# Altium PCB PA_8CH_USER_IFC.PcbDoc
Units mm, origin at the board's own origin, x right, y up, seen from the top; angles counter-clockwise.
Board outline 78 x 45 mm, 2 copper layers (Top Layer, Bottom Layer), stack 1.571 mm thick; 72 components, 88 nets, 324 pads, 96 vias.
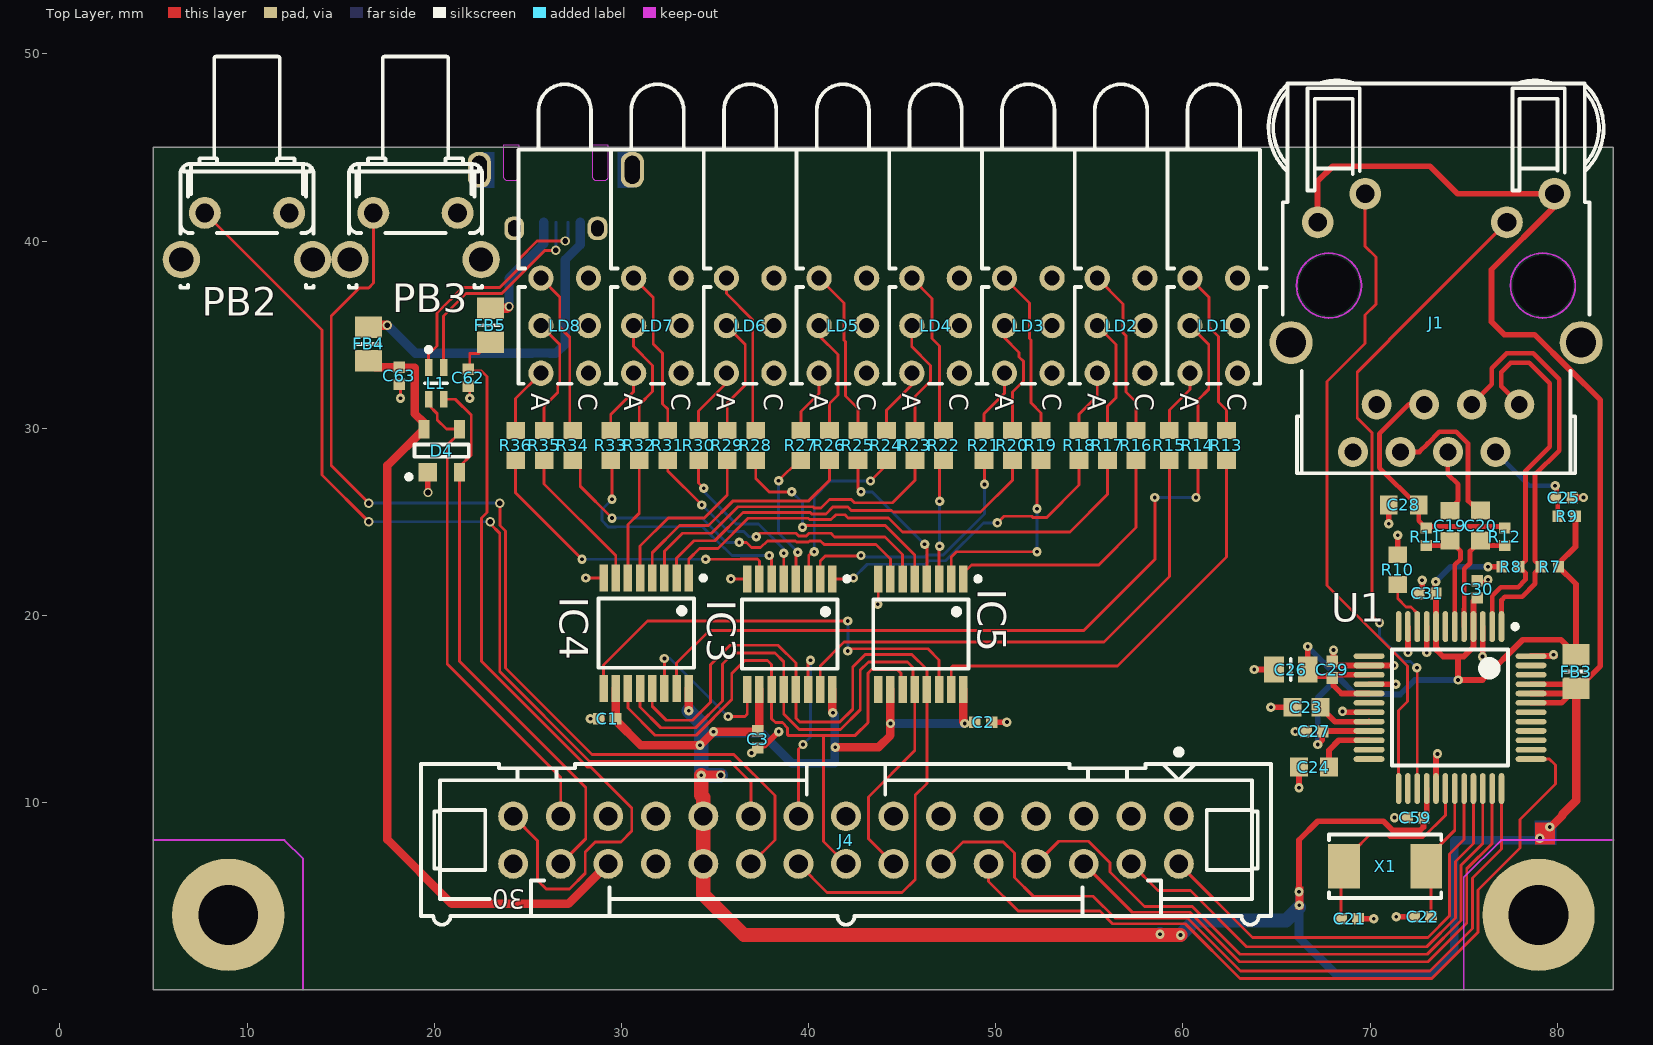
[diagram p0: Top Layer view]
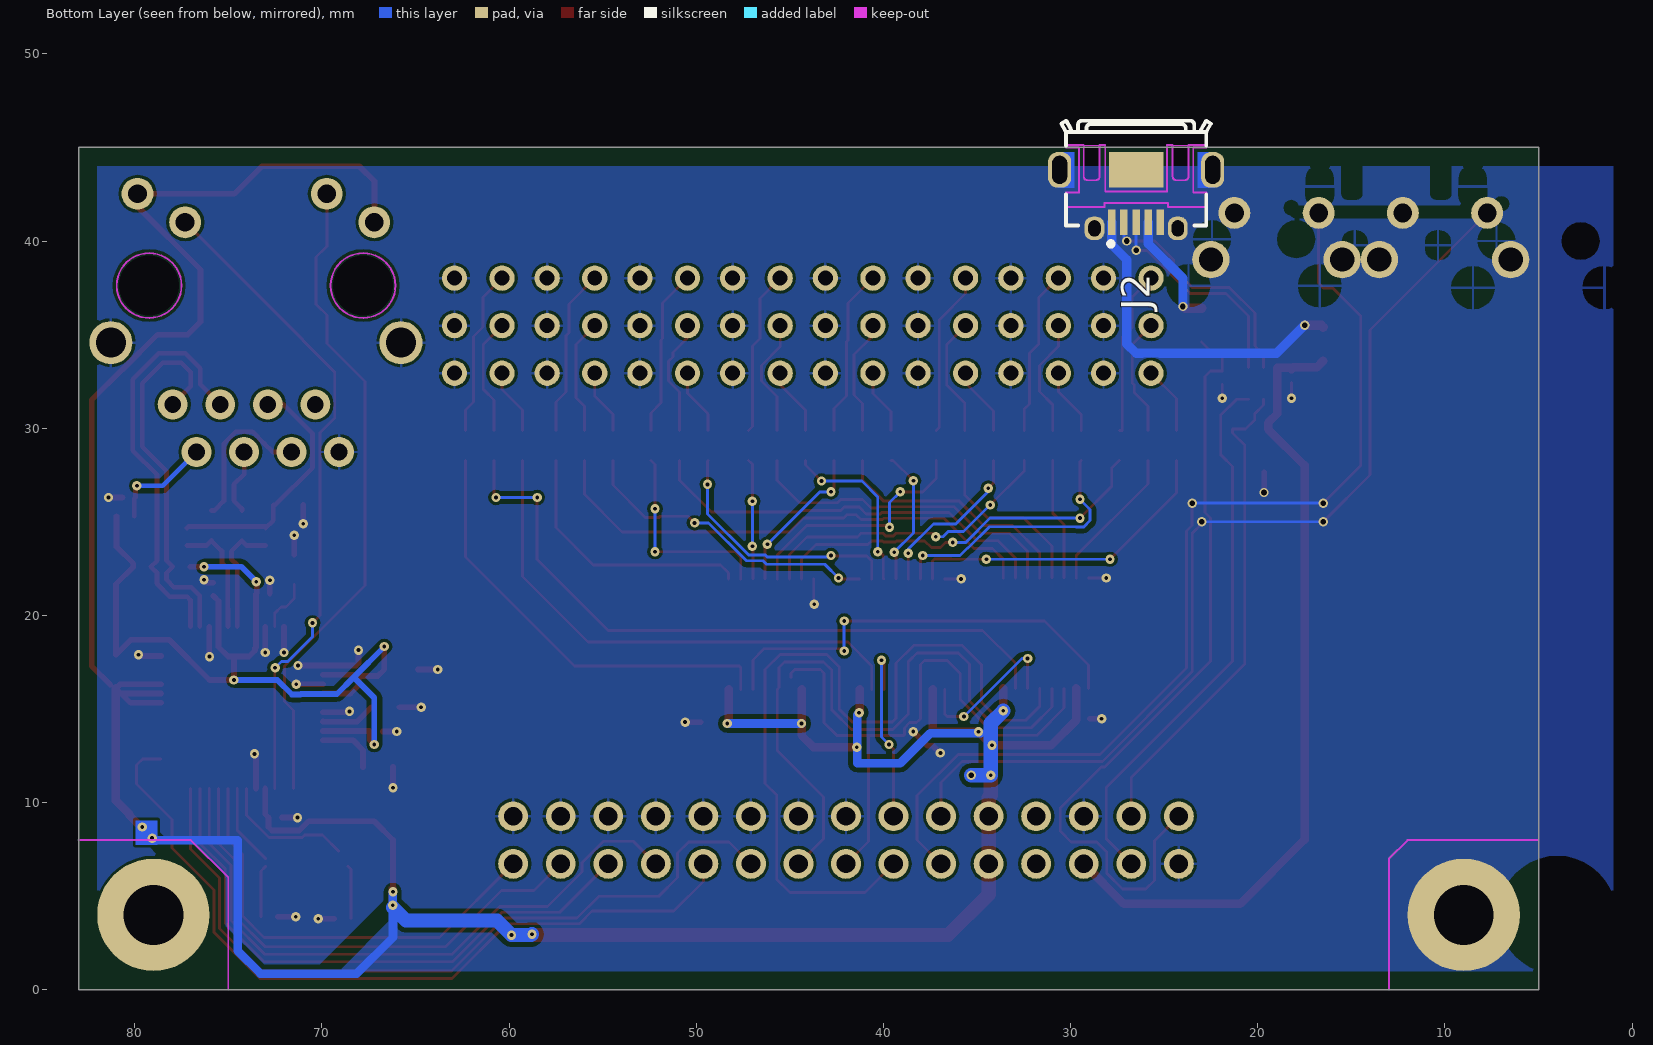
[diagram p1: Bottom Layer view, seen from below]
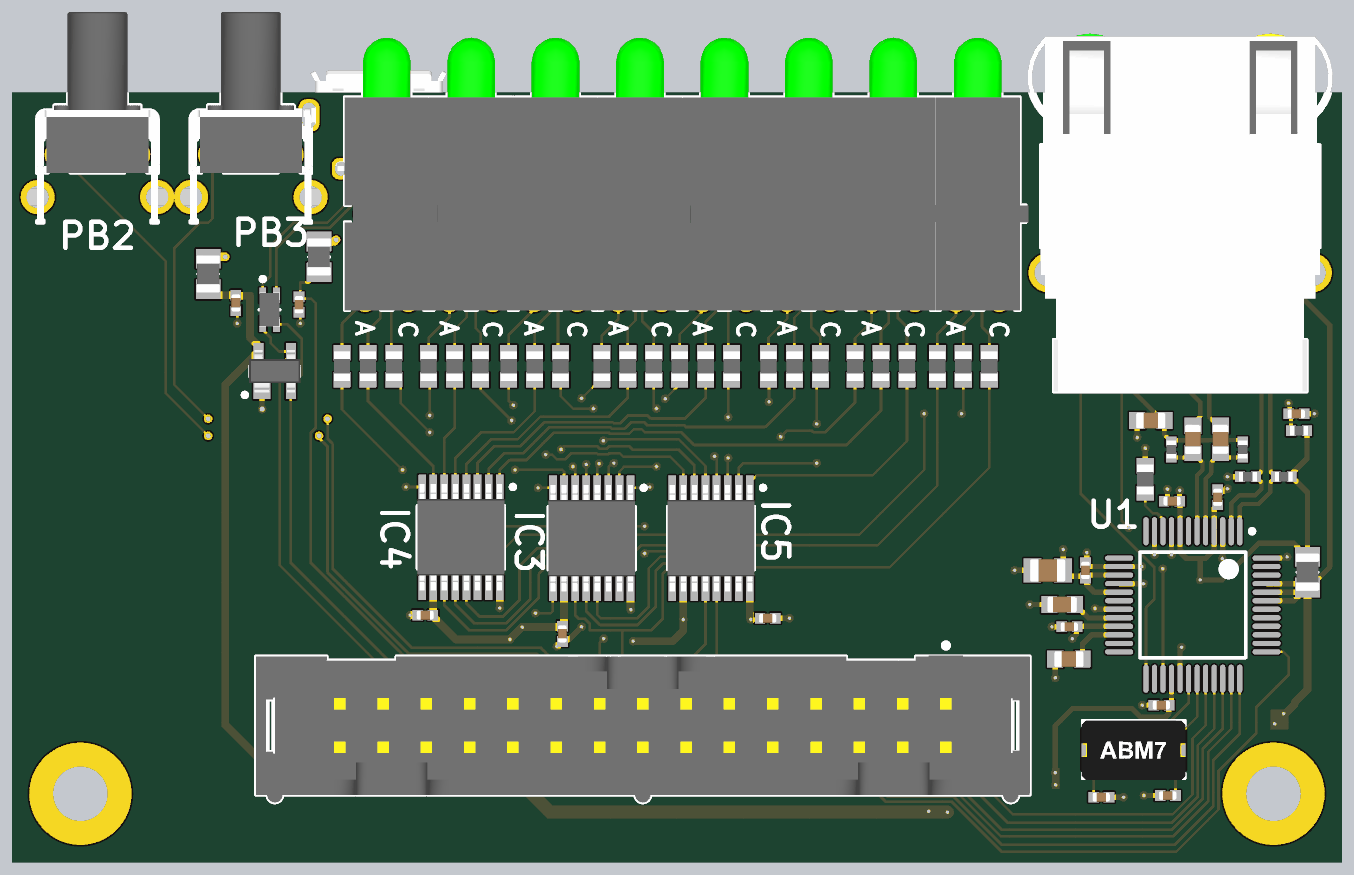
[diagram p2: 3D render of the assembled board from above, using the file's embedded part models]

## Layer stack, top to bottom
Top Solder: solder mask 0.0102, Solder Resist, Dk 3.5
Top Layer: signal copper 0.0356
Dielectric 1: dielectric 1.5, FR-4, Dk 4.8
Bottom Layer: signal copper 0.0356
Bottom Solder: solder mask 0.0102, Solder Resist, Dk 3.5

## Board outline
5,0 83,0 83,45 5,45

## Design rules (kind name [scope] priority, off if disabled: settings)
Clearance [All] p1: gap=0.152 except(0.254: Track-Poly Poly-Poly)
DiffPairsRouting [All] p1: maxlimit=0.254 minlimit=0.254 mostfreqgap=0.254 toplayer_minwidth=0.254 toplayer_maxwidth=0.381 toplayer_prefwidth=0.381 bottomlayer_minwidth=0.254 bottomlayer_maxwidth=0.381 bottomlayer_prefwidth=0.381 maxuncoupledlength=12.7
HoleSize [All] p1: absolutevalues=TRUE maxlimit=5.08 minlimit=0.2 maxpercent=80.000 minpercent=20.000
MinimumSolderMaskSliver [All] p1: minsoldermaskwidth=0.025
PolygonConnect PolygonConnect_pad [IsPad] p1: connectstyle=Relief reliefconductorwidth=0.152 reliefentries=4 polygonreliefangle="90 Angle" airgapwidth=0.152
PolygonConnect [All] p2: connectstyle=Direct reliefconductorwidth=0.254 reliefentries=4 polygonreliefangle="45 Angle" airgapwidth=0.254
RoomDefinition PA_8CH_USER_IFC [InComponentClass('PA_8CH_USER_IFC')] p1 off: confinementstyle=ConfineIn formatcopy=TRUE lockcomponents=FALSE outline 85.598,0.33 85.598,46.761 0.229,46.761 0.229,0.33
RoomDefinition U_LEDs [InComponentClass('U_LEDs')] p2 off: confinementstyle=ConfineIn formatcopy=TRUE lockcomponents=FALSE outline 86.557,48.796 15.818,48.796 15.818,-0.353 86.557,-0.353
RoomDefinition U_ETH_IFC [InComponentClass('U_ETH_IFC')] p3 off: confinementstyle=ConfineIn formatcopy=TRUE lockcomponents=FALSE outline 88.269,45.748 64,45.748 64,-0.861 88.269,-0.861
RoutingVias [All] p1: holewidth=0.711 width=0.5 viastyle="Through Hole" minholewidth=0.3 minwidth=0.5 maxholewidth=0.3 maxwidth=1.27
SilkToSilkClearance [All] p1: silktosilkclearance=0
SilkToSolderMaskClearance [IsPad] p1: minsilkscreentomaskgap=0 clearancetoexposedcopper=TRUE
SolderMaskExpansion [All] p1: expansion=0.102
Width [All] p1: maxlimit=2.54 minlimit=0.152 preferedwidth=0.152
25 further rules are at their usual default settings.

## Classes and differential pairs
component class PA_8CH_USER_IFC: C62 C63 D4 FB4 FB5 J2 J4 L1 PB2 PB3
component class U_ETH_IFC: C19 C20 C21 C22 C23 C24 C25 C26 C27 C28 C29 C30 C31 C59 FB3 J1 R7 R8 R9 R10 R11 R12 U1 X1
component class U_LEDs: C1 C2 C3 IC3 IC4 IC5 LD1 LD2 LD3 LD4 LD5 LD6 LD7 LD8 R13 R14 R15 R16 R17 R18 R19 R20 R21 R22 R23 R24 R25 R26 R27 R28 R29 R30 R31 R32 R33 R34 R35 R36
differential pair RJ45_TX: +RJ45_TX_P -RJ45_TX_N
differential pair RJ45_RX: +RJ45_RX_P -RJ45_RX_N
differential pair RJ45_RX_C: +RJ45_RX_C_P -RJ45_RX_C_N

## Components (designator, comment, footprint, x,y, rotation, side; value= is the part's Value field where it differs from the comment)
C1 "100nF" CAPC1005X55N 29.235,14.478 r180 top
C2 "100nF" CAPC1005X55N 49.327,14.3 r0 top
C3 "100nF" CAPC1005X55N 37.287,13.386 r270 top
C19 "10nF" CAPC1608X87N 74.27,24.793 r90 top
C20 "10nF" CAPC1608X87N 75.9,24.8 r90 top
C21 "22pF" CAPC1005X55N 68.9,3.8 r180 top
C22 "22pF" CAPC1005X55N 72.8,3.9 r0 top
C23 "4.7uF" CAPC1709X95N 66.6,15.1 r180 top
C24 "10nF" CAPC1608X87N 67,11.9 r0 top
C25 "100nF" CAPC1005X55N 80.34,26.289 r0 top
C26 "10uF" CAPC2012X135N 65.761,17.109 r180 top
C27 "100nF" CAPC1005X55N 67.024,13.8 r180 top
C28 "10nF" CAPC1608X87N 71.8,25.9 r0 top
C29 "100nF" CAPC1005X55N 67.971,17.109 r90 top
C30 "100nF" CAPC1005X55N 75.724,21.4 r90 top
C31 "100nF" CAPC1005X55N 73.051,21.173 r180 top
C59 "100nF" CAPC1005X55N 72.424,9.2 r180 top
C62 "100nF" CAPC1005X55N 21.824,32.7 r90 top
C63 "100nF" CAPC1005X55N 18.124,32.8 r90 top
D4 "PRTR5V0U2X" SOT190P230X110-4N 20.4,28.8 r90 top
FB3 "220R@100MHz" INDC2012X105N 81,17 r90 top
FB4 "220R@100MHz" INDC2012X105N 16.5,34.5 r90 top
FB5 "220R@100MHz" INDC2012X105N 23,35.5 r90 top
IC3 "SN74LV595APWT" SOP65P640X120-16N 39,19 r270 top
IC4 "SN74LV595APWT" SOP65P640X120-16N 31.325,19.05 r270 top
IC5 "SN74LV595APWT" SOP65P640X120-16N 46,19 r270 top
J1 "RJ45" TYCO_5-6605308-1 73.525,30 r180 top locked
J2 "Micro-USB AB 2.0" HIROSE_ZX62RD-AB-5P8 26.5,41 r0 bottom locked
J4 "Familly" 3M_N2530-6002RB 42,8 r180 top
L1 "90R@100MHz" IND_MURATA_DLW21S 20.1,32.4 r270 top
LD1 "Red/Yellow/Green" LED_MENTOR_1882.2781 61.645,35.478 r270 top locked
LD2 "Red/Yellow/Green" LED_MENTOR_1882.2781 56.692,35.478 r270 top locked
LD3 "Red/Yellow/Green" LED_MENTOR_1882.2781 51.739,35.478 r270 top locked
LD4 "Red/Yellow/Green" LED_MENTOR_1882.2781 46.786,35.478 r270 top locked
LD5 "Red/Yellow/Green" LED_MENTOR_1882.2781 41.833,35.478 r270 top locked
LD6 "Red/Yellow/Green" LED_MENTOR_1882.2781 36.88,35.478 r270 top locked
LD7 "Red/Yellow/Green" LED_MENTOR_1882.2781 31.927,35.478 r270 top locked
LD8 "Red/Yellow/Green" LED_MENTOR_1882.2781 26.974,35.478 r270 top locked
PB2 "Push Button" PB_TYCO_1-1825027-1 10,41.5 r270 top locked
PB3 "Push Button" PB_TYCO_1-1825027-1 19,41.5 r270 top locked
R7 "49R9" RESC1005X40N 79.6,22.6 r0 top
R8 "49R9" RESC1005X40N 77.5,22.6 r180 top
R9 "10" RESC1005X40N 80.5,25.3 r180 top
R10 "12k4" RESC1608X55N 71.476,22.443 r90 top
R11 "49R9" RESC1005X40N 73,24.2 r270 top
R12 "49R9" RESC1005X40N 77.2,24.2 r270 top
R13 "330" RESC1608X55N 62.323,29.082 r90 top
R14 "330" RESC1608X55N 60.799,29.082 r90 top
R15 "330" RESC1608X55N 59.275,29.082 r90 top
R16 "330" RESC1608X55N 57.497,29.082 r90 top
R17 "330" RESC1608X55N 55.973,29.082 r90 top
R18 "330" RESC1608X55N 54.449,29.082 r90 top
R19 "330" RESC1608X55N 52.417,29.082 r90 top
R20 "330" RESC1608X55N 50.893,29.082 r90 top
R21 "330" RESC1608X55N 49.369,29.082 r90 top
R22 "330" RESC1608X55N 47.21,29.082 r90 top
R23 "330" RESC1608X55N 45.686,29.082 r90 top
R24 "330" RESC1608X55N 44.162,29.082 r90 top
R25 "330" RESC1608X55N 42.638,29.082 r90 top
R26 "330" RESC1608X55N 41.114,29.082 r90 top
R27 "330" RESC1608X55N 39.59,29.082 r90 top
R28 "330" RESC1608X55N 37.177,29.082 r90 top
R29 "330" RESC1608X55N 35.653,29.082 r90 top
R30 "330" RESC1608X55N 34.129,29.082 r90 top
R31 "330" RESC1608X55N 32.478,29.082 r90 top
R32 "330" RESC1608X55N 30.954,29.082 r90 top
R33 "330" RESC1608X55N 29.43,29.082 r90 top
R34 "330" RESC1608X55N 27.398,29.082 r90 top
R35 "330" RESC1608X55N 25.874,29.082 r90 top
R36 "330" RESC1608X55N 24.35,29.082 r90 top
U1 "W5500" WIZ-W5500-LQFP-48_M 74.27,15.077 r270 top
X1 "QSDG25M000-TXC" XTAL_5.0*3.2 70.8,6.6 r0 top

## Footprints (in the part's own frame and the unit in brackets; to place one, negate y for a bottom-side part, rotate by r counter-clockwise, add the part's x,y. Pads: shape width x height; smd on the part's side, far side on the other; paste and mask are expansions set on the pad)
3M_N2530-6002RB [mm] "30 Contacts - Straight .100\" x .100\" Low Profile Four-Wall Header"
  round 1.6 hole 1: 1(-17.78,-1.27) 2(-17.78,1.27) 3(-15.24,-1.27) 4(-15.24,1.27) 5(-12.7,-1.27) 6(-12.7,1.27) 7(-10.16,-1.27) 8(-10.16,1.27) 9(-7.62,-1.27) 10(-7.62,1.27) 11(-5.08,-1.27) 12(-5.08,1.27) 13(-2.54,-1.27) 14(-2.54,1.27) 15(0,-1.27) 16(0,1.27) 17(2.54,-1.27) 18(2.54,1.27) 19(5.08,-1.27) 20(5.08,1.27) 21(7.62,-1.27) 22(7.62,1.27) 23(10.16,-1.27) 24(10.16,1.27) 25(12.7,-1.27) 26(12.7,1.27) 27(15.24,-1.27) 28(15.24,1.27) 29(17.78,-1.27) 30(17.78,1.27)
  silkscreen extent -22.71,-4.85 22.71,4.52, body extent -22.71,-4.11 22.71,4.52, height 9.91
CAPC1005X55N [mm] "Chip Capacitor, Body 1.0x0.55mm, IPC Medium Density"
  rect 0.62x0.62 smd: 1(-0.45,0) 2(0.45,0)
  body extent -0.52,-0.27 0.53,0.28, height 0.55
CAPC1608X87N [mm] "Chip Capacitor, Body 1.6x0.8mm IPC Medium Density"
  rect 0.95x1 smd: 1(-0.8,0) 2(0.8,0)
  body extent -0.87,-0.47 0.88,0.48, height 0.87
CAPC1709X95N [mm] "Capacitor, non-Polarized, Chip; 1.65mm L X 0.85mm W X 0.95mm H,IPC Medium Density"
  rect 0.95x1 smd: 1(-0.75,0) 2(0.75,0)
  body extent -0.87,-0.47 0.88,0.48, height 0.95
CAPC2012X135N [mm] "Chip Capacitor, Body 2.0x1.25mm, IPC Medium Density"
  rect 1.05x1.4 smd: 1(-0.9,0) 2(0.9,0)
  silkscreen extent 0,-0.58 0,0.58, body extent -1.05,-0.67 1.05,0.68, height 1.25
HIROSE_ZX62RD-AB-5P8 [mm] "Right Angle, SMD Micro-USB Type AB - Reverse (Top mount), Shell Through Hole"
  rect 0.4x1.35 smd: 1(1.3,0) 2(0.65,0) 3(0,0) 4(-0.65,0) 5(-1.3,0)
  rrect80% 1.225x1.9 hole 0.8 slot 1.5 at 90 deg: 6(-4.088,-2.8) 6(4.088,-2.8)
  rrect80% 1.05x1.25 hole 0.65 slot 0.85 at 90 deg: 6(-2.225,0.325) 6(2.225,0.325)
  rect 2.9x1.9 smd: PastePad(0,-2.8)
  Top Layer region: 4.2,-3.75 4.2,-1.85 3.3,-1.85 3.3,-1.85 3.3,-3.75
  Top Layer region: -4.2,-1.85 -4.2,-3.75 -3.3,-3.75 -3.3,-3.75 -3.3,-1.85
  Top Layer keep-out lines w0.1: -3.75,-0.825 -1.7,-0.825 -1.7,-1.025 1.7,-1.025 1.7,-0.825 3.75,-0.825 3.75,-1.6 3.05,-1.6 3.05,-4 3.75,-4 3.75,-4.125 2.8,-4.125 2.8,-2.45 ccw(c2.6,-2.45) 2.6,-2.25 2.15,-2.25 ccw(c2.15,-2.45) 1.95,-2.45 1.95,-4.125 1.65,-4.125 1.65,-1.65 -1.65,-1.65 -1.65,-4.125 -1.95,-4.125 -1.95,-2.45 ccw(c-2.15,-2.45) -2.15,-2.25 -2.6,-2.25 ccw(c-2.6,-2.45) -2.8,-2.45 -2.8,-4.125 -3.75,-4.125 -3.75,-4 -3.05,-4 -3.05,-1.6 -3.75,-1.6 -3.75,-0.825
  Keep-Out Layer board cut-out: -2.8,-4.125 -2.8,-2.45 -2.785,-2.373 -2.741,-2.309 -2.676,-2.265 -2.6,-2.25 -2.6,-2.25 -2.15,-2.25 -2.073,-2.265 -2.009,-2.309 -1.965,-2.373 -1.95,-2.45 -1.95,-2.45 -1.95,-4.125
  Keep-Out Layer board cut-out: 1.95,-4.125 1.95,-2.45 1.965,-2.373 2.009,-2.309 2.074,-2.265 2.15,-2.25 2.15,-2.25 2.6,-2.25 2.677,-2.265 2.741,-2.309 2.785,-2.373 2.8,-2.45 2.8,-2.45 2.8,-4.125
  silkscreen extent -4,-5.42 4,1.27, body extent -4.32,-5.42 4.33,0.47, height 2.78
IND_MURATA_DLW21S [mm] "Common Mode Choke Coil, DLW21S Series - Body 2 x 1.2mm"
  rect 0.9x0.4 smd: 1(-0.85,-0.4) 2(0.85,-0.4) 3(0.85,0.4) 4(-0.85,0.4)
  silkscreen extent -1.92,-0.6 0,0.6, body extent -1,-0.6 1,0.6, height 1.4
INDC2012X105N [mm] "Chip Inductor, EIA 0805, Metric 2012, Body 2.0x1.25mm, IPC Medium Density"
  rect 1.15x1.45 smd: 1(-0.9,0) 2(0.9,0)
  silkscreen extent 0,-0.6 0,0.6, body extent -1.1,-0.7 1.1,0.7, height 1.1
LED_MENTOR_1882.2781 [mm] "3x LED 3mm (Red+Yellow +Green) PCB Edge Mounting MENTOR 1882.2781"
  round 1.35 hole 0.8: 1(-2.54,1.27) 2(-2.54,-1.27) 3(0,1.27) 4(0,-1.27) 5(2.54,1.27) 6(2.54,-1.27)
  silkscreen extent -12.9,-2.47 3.1,2.83, body extent -12.88,-2.47 3.12,2.98, height 12
PB_TYCO_1-1825027-1 [mm] "Right Angle Micro Miniature Tactile Pushbutton Switche, Round Actuator Length = 5.74mm, FSMRAJ Serie"
  round 1.7 hole 1: 1(0,-2.25) 2(0,2.25)
  round 2 hole 1.3: 3(2.49,-3.505) 4(2.49,3.505)
  silkscreen extent -8.36,-3.56 4,3.56, body extent -8.36,-4.2 4,4.2, height 7.01
RESC1005X40N [mm] "Chip Resistor, EIA 0402, Metric 1005, Body 1.0x0.5mm, IPC Medium Density"
  rect 0.58x0.62 smd: 1(-0.47,0) 2(0.47,0)
  body extent -0.52,-0.27 0.53,0.28, height 0.4
RESC1608X55N [mm] "Chip Resistor, EIA 0603, Metric 1608, Body 1.6x0.8mm, IPC Medium Density"
  rect 0.9x1 smd: 1(-0.8,0) 2(0.8,0)
  body extent -0.87,-0.47 0.88,0.48, height 0.55
SOP65P640X120-16N [mm] "SOP, 0.65mm pitch; 16 pin, 4.40mm W X 5.00mm L X 1.20mm H body IPC Medium Density"
  rect 1.45x0.45 smd: 1(-2.95,2.275) 2(-2.95,1.625) 3(-2.95,0.975) 4(-2.95,0.325) 5(-2.95,-0.325) 6(-2.95,-0.975) 7(-2.95,-1.625) 8(-2.95,-2.275) 9(2.95,-2.275) 10(2.95,-1.625) 11(2.95,-0.975) 12(2.95,-0.325) 13(2.95,0.325) 14(2.95,0.975) 15(2.95,1.625) 16(2.95,2.275)
  silkscreen extent -3.07,-2.55 1.85,3.17, body extent -3.12,-2.55 3.12,2.55, height 1.2
SOT190P230X110-4N [mm] "SOT143, SOT, 1.90mm Pitch; 4 Pin, 1.30mm W X 2.90mm L X 1.10mm H body, IPC Medium Density"
  rect 1x1 smd: 1(-1.15,0.75)
  rect 1x0.6 smd: 2(-1.15,-0.95) 3(1.15,-0.95) 4(1.15,0.95)
  silkscreen extent -1.52,-1.45 0.33,1.87, body extent -1.25,-1.5 1.25,1.5, height 1.1
TYCO_5-6605308-1 [mm] "1 Port, Yellow/Green LEDs, RJ45 10/100Base-T Ethernet, Mag45 Connector Module With Integrated Magnetics"
  round 1.6 hole 0.9: 1(-4.445,-1.27) 2(-3.175,1.27) 3(-1.905,-1.27) 4(-0.635,1.27) 5(0.635,-1.27) 6(1.905,1.27) 7(3.175,-1.27) 8(4.445,1.27)
  round 2.3 hole 1.6: 9(-7.747,-4.572) 10(7.747,-4.572)
  round 1.7 hole 1: D1(-6.325,-12.522) D2(-3.785,-10.998) D3(6.325,-10.998) D4(3.785,-12.522)
  round 0.5 hole 3.2 unplated mask+1.35: M1(-5.715,-7.62) M2(5.715,-7.62)
  silkscreen extent -8.95,-18.59 8.95,2.41, body extent -8.95,-18.6 8.95,2.41, height 14.97
WIZ-W5500-LQFP-48_M [mm] "LQFP, 48-Leads, Body 7.00x7.00mm, Pitch 0.50mm, IPC Low Density"
  oval 1.65x0.3 smd: 1(-4.325,2.75) 2(-4.325,2.25) 3(-4.325,1.75) 4(-4.325,1.25) 5(-4.325,0.75) 6(-4.325,0.25) 7(-4.325,-0.25) 8(-4.325,-0.75) 9(-4.325,-1.25) 10(-4.325,-1.75) 11(-4.325,-2.25) 12(-4.325,-2.75) 25(4.325,-2.75) 26(4.325,-2.25) 27(4.325,-1.75) 28(4.325,-1.25) 29(4.325,-0.75) 30(4.325,-0.25) 31(4.325,0.25) 32(4.325,0.75) 33(4.325,1.25) 34(4.325,1.75) 35(4.325,2.25) 36(4.325,2.75)
  oval 0.3x1.65 smd: 13(-2.75,-4.325) 14(-2.25,-4.325) 15(-1.75,-4.325) 16(-1.25,-4.325) 17(-0.75,-4.325) 18(-0.25,-4.325) 19(0.25,-4.325) 20(0.75,-4.325) 21(1.25,-4.325) 22(1.75,-4.325) 23(2.25,-4.325) 24(2.75,-4.325) 37(2.75,4.325) 38(2.25,4.325) 39(1.75,4.325) 40(1.25,4.325) 41(0.75,4.325) 42(0.25,4.325) 43(-0.25,4.325) 44(-0.75,4.325) 45(-1.25,4.325) 46(-1.75,4.325) 47(-2.25,4.325) 48(-2.75,4.325)
  silkscreen extent -4.45,-3.1 3.1,3.6, body extent -3.5,-3.5 3.5,3.5, height 1.6
XTAL_5.0*3.2 [mm]
  rect 1.7x2.4 smd: 1(-2.2,0) 2(2.2,0)
  silkscreen extent -3,-1.7 3,1.7, body extent -3.05,-1.8 3.05,1.7, height 1.44

## Part data
C1 C2 C3 C25 C27 C29 C30 C31 C59 C62 C63: library part CC0402_100NF_16V_10%_X7R, "Non-polarised capacitor"
C19 C20 C24 C28: library part CC0603_10NF_50V_5%_C0G, "Non-polarised capacitor"
C21 C22: library part CC0402_22PF_50V_5%_NP0, "Non-polarised capacitor"
C23: library part CC0603_4.7UF_16V_10%_X5R, "Non-polarised capacitor"
C26: library part CC0805_10UF_10V_10%_X7R, "Non-polarised capacitor"
D4: "Ultra Low Capacitance Double Rail-to-Rail ESD Protection Diode"
FB3 FB4 FB5: library part IND0805_MURATA_BLM21PG221SN1D, "Inductor"
IC3 IC4 IC5: "8-Bit Shift Register With 3-State Output Register"
J1: library part TYCO_5-6605308-1, "1 Port, Yellow/Green LEDs, RJ45 10/100Base-T Ethernet, Mag45 Connector Module With Integrated Magnetics"
J2: library part HIROSE_ZX62RD-AB-5P8, "5 Pin + 1 Shield USB Receptacle"
J4: library part 3M_N2530-6002RB, "Connector 30 Male"
L1: library part IND_MURATA_DLW21SN900SQ2L, "Inductor Common Mode"
LD1 LD2 LD3 LD4 LD5 LD6 LD7 LD8: library part LED_MENTOR_1882.2781, "LED x3 G-1C2A-BOT_Y-3C4A_R-5C6A-TOP"
PB2 PB3: library part PB_TYCO_1-1825027-1, "Push-Button Switch SPDT"
R7 R8 R11 R12: library part R0402_49R9_1%_0.0625W_100PPM, "Resistor - 1%"
R9: library part R0402_10R_1%_0.0625W_200PPM, "Resistor - 1%"
R10: library part R0603_12K4_0.1%_0.063W_10PPM, "Resistor - 0.1%"
R13 R14 R15 R16 R17 R18 R19 R20 R21 R22 R23 R24 R25 R26 R27 R28 R29 R30 R31 R32 R33 R34 R35 R36: library part R0603_330R_1%_0.1W_100PPM, "Resistor - 1%"
U1: library part CMP-1775-00001-1, "Hardwired TCP/IP Embedded Ethernet Controller, 3.3 V, 25 MHz, -40 to 85 degC, 48-Pin LQFP, RoHS, Tray"
X1: library part X_CRYSTAL_SMD_5.0*3.2, "miniature crystal oscillator (Maritex)"

## Free pads (board coordinates)
  round 6 hole 3.2 unplated: 0(9,4) 1(79,4)

## Via types
v1: diameter 0.5, hole 0.2, Top Layer to Bottom Layer, tented both sides, 86 vias
v2: diameter 0.5, hole 0.3, Top Layer to Bottom Layer, 8 vias
v3: diameter 0.5, hole 0.3, Top Layer to Bottom Layer, tented both sides, 2 vias

## Nets (pads, with @x,y where several pads share a name; then routed paths per layer and width w, separated by ;. In a path a pad name is that pad's centre, name@x,y a point inside that pad or via, vN(x,y) a via of type N, cw(c..) or ccw(c..) an arc to the next point about the centre after c; other vN are vias at no path point)
GND: C1.2 C2.2 C3.2 C21.1 C22.1 C23.2 C24.1 C25.2 C26.2 C27.2 C28.1 C29.2 C30.2 C31.2 C59.2 C62.1 C63.1 D4.1 IC3.8 IC4.8 IC5.8 J1.8 J1.9 J1.10 J2.5 J2.6 J4.1 J4.3 J4.5 J4.7 J4.9 J4.11 J4.13 J4.15 J4.25 J4.30 LD1.1 LD1.3 LD1.5 LD2.1 LD2.3 LD2.5 LD3.1 LD3.3 LD3.5 LD4.1 LD4.3 LD4.5 LD5.1 LD5.3 LD5.5 LD6.1 LD6.3 LD6.5 LD7.1 LD7.3 LD7.5 LD8.1 LD8.3 LD8.5 pad.0 PB2.2 PB2.3 PB2.4 PB3.2 PB3.3 PB3.4 R10.2 U1.3 U1.9 U1.11 U1.14 U1.16 U1.19 U1.29 U1.48 | length 34.5
  Top Layer w0.152: v1(18.2,31.6) C63.1@18.2,32.45 ; v1(21.9,31.6) C62.1@21.9,32.35 ; v1(28.1,22) IC4.8 ; v1(35.85,21.95) IC3.8 ; v1(43.7,20.6) 43.725,20.625 IC5.8
  Top Layer w0.305: D4.1 19.65,26.585 v3(19.667,26.568) ; v1(28.346,14.478) C1.2@28.962,14.478 ; v1(36.957,12.649) 36.977,12.649 37.363,13.036 37.648,13.036 v1(38.405,13.792) ; C2.2@49.753,14.3 v1(50.597,14.3) ; v1(63.809,17.109) C26.2 ; v1(64.7,15.1) C23.2 ; v1(66,13.8) C27.2@66.75,13.8 ; v1(66.2,10.8) C24.1 ; v1(68.047,18.147) 68.047,17.459 68.179,17.327 U1.14 v1(71.273,17.327) ; v1(68.527,14.873) 68.527,14.827 U1.19 ; C21.1 v1(70.2,3.8) ; U1.16 v1(71.373,16.327) ; v1(71,24.9) C28.1 ; v1(71.3,9.2) C59.2@72.15,9.2 ; v1(71.4,3.9) C22.1 ; R10.2 v1(71.476,24.276) ; v1(72.02,18.02) U1.11 ; C31.2@72.777,21.173 v1(72.777,21.877) ; v1(73.02,18.02) U1.9 ; U1.29 73.52,12.52 v1(73.6,12.6) ; C30.2@75.8,21.75 76.15,21.75 v1(76.3,21.9) ; v1(76,17.8) 76.02,17.82 U1.3 ; U1.48 79.873,17.827 v1(79.8,17.9) ; C25.2@80.65,26.3 v1(81.4,26.3)
INT: J4.12 U1.36 | length 41.6
  Top Layer w0.152: J4.12 48.25,7.9 50.4,7.9 51,7.3 51,6 52,5 55.2,5 56.365,3.835 60.247,3.835 63.082,1 73.2,1 75.467,3.267 75.467,5.967 77.02,7.52 U1.36
LED_CS: IC3.12 IC4.12 IC5.12 J4.14 | length 37.2
  Top Layer w0.152: IC4.12 31,15.1 32.1,14 33.969,14 35.4,15.431 35.4,17.4 36,18 38.2,18 38.675,17.525 IC3.12 38.675,14.725 39.5,13.9 41.7,13.9 42.763,14.963 42.763,17.08 43.195,17.512 45.288,17.512 45.58,17.22 45.58,16.145 IC5.12 45.675,12.775 43.2,10.3 43.2,8.07 J4.14
LED_GREEN_CH0: IC5.15 R13.1 | length 23.5
  Top Layer w0.152: IC5.15 47.625,17.225 47.7,17.3 56.5,17.3 62.323,23.123 R13.1
LED_GREEN_CH1: IC5.1 R16.1 | length 14.1
  Top Layer w0.152: IC5.1 48.275,22.275 48.7,22.7 55.5,22.7 57.497,24.697 R16.1
LED_GREEN_CH2: IC5.2 R19.1 | length 10.8
  Top Layer w0.152: IC5.2 47.625,23.125 47.9,23.4 v1(52.2,23.4) ; v1(52.2,25.7) 52.2,28.065 R19.1
  Bottom Layer w0.152: v1(52.2,23.4) v1(52.2,25.7)
LED_GREEN_CH3: IC5.3 R22.1 | length 6.4
  Top Layer w0.152: IC5.3 46.975,23.675 v1(47,23.7) ; v1(47,26.1) 47,28.072 R22.1
  Bottom Layer w0.152: v1(47,23.7) v1(47,26.1)
LED_GREEN_CH4: IC5.4 R25.1 | length 8.3
  Top Layer w0.152: R25.1 42.638,26.762 v1(42.8,26.6) ; v1(46.2,23.8) 46.3,23.8 46.325,23.775 IC5.4
  Bottom Layer w0.152: v1(42.8,26.6) 43.4,26.6 v1(46.2,23.8)
LED_GREEN_CH5: IC5.5 R28.1 | length 13.3
  Top Layer w0.152: R28.1 37.177,27.323 37.9,26.6 v1(39.1,26.6) ; v1(39.675,24.714) 39.675,24.784 39.691,24.8 44.1,24.8 45.675,23.225 IC5.5
  Bottom Layer w0.152: v1(39.1,26.6) 39.675,26.025 v1(39.675,24.714)
LED_GREEN_CH6: IC5.6 R31.1 | length 16.5
  Top Layer w0.152: R31.1 32.478,27.722 v1(34.3,25.9) ; v1(37.2,24.2) 37.387,24.387 39.326,24.387 39.477,24.236 39.873,24.236 40.024,24.387 41.193,24.387 41.393,24.187 44.088,24.187 45.025,23.25 IC5.6
  Bottom Layer w0.152: v1(34.3,25.9) 35.72,24.48 36.54,24.48 36.821,24.2 v1(37.2,24.2)
LED_GREEN_CH7: IC5.7 R34.1 | length 21.1
  Top Layer w0.152: R34.1 27.8,27.88 27.8,26.9 v1(29.5,25.2) ; v1(36.3,23.9) 36.679,23.9 36.96,23.62 37.44,23.62 37.801,23.98 39.301,23.98 39.35,23.931 39.999,23.931 40.049,23.98 40.64,23.98 40.84,23.78 43.603,23.78 44.375,23.008 IC5.7
  Bottom Layer w0.152: v1(29.5,25.2) 34.3,25.2 35.6,23.9 v1(36.3,23.9)
LED_OEN: IC3.13 IC4.13 IC5.13 J4.18 | length 44
  Top Layer w0.152: IC4.13 31.65,15.15 32.4,14.4 33.8,14.4 34.762,15.362 34.762,17.362 35.806,18.406 38.368,18.406 39.325,17.45 IC3.13 39.325,14.506 39.531,14.3 41.669,14.3 42.357,14.988 42.357,17.248 43.027,17.918 45.515,17.918 46.325,17.108 IC5.13 46.325,11.025 45.7,10.4 45.7,5.9 45,5.2 40.99,5.2 J4.18
LED_RED_CH0: IC3.15 R15.1 | length 28.1
  Top Layer w0.152: IC3.15 40.625,17.302 41.902,18.579 55.779,18.579 59.275,22.075 R15.1
LED_RED_CH1: IC3.1 R18.1 | length 16.6
  Top Layer w0.152: IC3.1 42.35,21.95 v1(42.4,22) ; v1(50.089,24.943) 50.444,25.298 51.925,25.298 52.002,25.221 52.704,25.221 54.449,26.966 R18.1
  Bottom Layer w0.152: v1(42.4,22) 43.133,22.733 46.253,22.733 46.437,22.917 47.324,22.917 49.351,24.943 v1(50.089,24.943)
LED_RED_CH2: IC3.2 R21.1 | length 13.7
  Top Layer w0.152: IC3.2 40.625,22.905 40.88,23.16 40.88,23.18 42.78,23.18 v1(42.8,23.2) ; R21.1 49.4,28.251 v1(49.4,27)
  Bottom Layer w0.152: v1(42.8,23.2) 42.88,23.12 46.209,23.12 46.311,23.221 47.198,23.221 49.4,25.423 v1(49.4,27)
LED_RED_CH3: IC3.3 R24.1 | length 9.4
  Top Layer w0.152: IC3.3 40.009,21.984 40.009,23.209 40.2,23.4 v1(40.3,23.4) ; v1(43.307,27.178) 44.162,28.033 R24.1
  Bottom Layer w0.152: v1(40.3,23.4) 40.3,26.33 41.15,27.18 v1@43.307,27.18
LED_RED_CH4: IC3.4 R27.1 | length 7.4
  Top Layer w0.152: v1(38.4,27.2) 39.482,28.282 R27.1 ; IC3.4 39.325,23.267 v1(39.429,23.371)
  Bottom Layer w0.152: v1(38.4,27.2) 38.4,24.4 v1(39.429,23.371)
LED_RED_CH5: IC3.5 R30.1 | length 8.9
  Top Layer w0.152: R30.1 34.129,27.071 v1(34.4,26.8) ; IC3.5 v1(38.675,23.325)
  Bottom Layer w0.152: v1(34.4,26.8) 34.4,26.621 36.134,24.887 37.334,24.887 38.675,23.546 v1(38.675,23.325)
LED_RED_CH6: IC3.6 R33.1 | length 14.6
  Top Layer w0.152: R33.1 29.5,28.212 v1(29.5,26.2) ; v1(37.9,23.2) 38,23.2 38.025,23.175 IC3.6
  Bottom Layer w0.152: v1(29.5,26.2) 28.956,25.656 28.956,25.067 29.302,24.721 29.698,24.721 29.716,24.74 34.329,24.74 35.474,23.595 35.511,23.595 35.906,23.2 v1(37.9,23.2)
LED_RED_CH7: IC3.7 R36.1 | length 17.2
  Top Layer w0.152: R36.1 24.35,26.55 v1(27.9,23) ; v1(34.5,23) 36.358,23 36.363,23.005 37.274,23.005 37.375,22.904 IC3.7
  Bottom Layer w0.152: v1(27.9,23) v1(34.5,23)
LED_SCK: IC3.11 IC4.11 IC5.11 J4.16 | length 32.9
  Top Layer w0.152: IC4.11 30.35,15.05 31.8,13.6 34,13.6 35.9,15.5 35.9,16.9 36.594,17.594 37.806,17.594 38.025,17.375 IC3.11 38.025,14.475 38.229,14.271 38.603,14.271 38.883,13.99 38.883,13.617 38.906,13.594 40.8,13.594 ; J4.16 40.8,7.93 40.8,13.594 ; IC5.11@44.93,16.699 44.93,16.912 44.737,17.105 43.363,17.105 43.17,16.912 43.17,14.27 42.494,13.594 40.8,13.594
LED_SDI: IC3.14 J4.17 | length 10.2
  Top Layer w0.152: J4.17 39.46,12.86 v1(39.7,13.1) ; IC3.14 39.975,17.475 v1(40.1,17.6)
  Bottom Layer w0.152: v1(39.7,13.1) 40.1,13.5 v1(40.1,17.6)
LED_YELLOW_CH0: IC4.15 R14.1 | length 36.7
  Top Layer w0.152: IC4.15 32.95,17.45 34.7,19.2 54.7,19.2 58.5,23 v1(58.5,26.3) ; v1(60.7,26.3) 60.799,26.399 R14.1
  Bottom Layer w0.152: v1(58.5,26.3) v1(60.7,26.3)
LED_YELLOW_CH1: IC4.1 R17.1 | length 27.4
  Top Layer w0.152: IC4.1 33.6,23 34.18,23.58 35.16,23.58 36.772,25.193 39.975,25.193 40.047,25.121 41.2,25.121 41.46,25.38 41.94,25.38 42.114,25.206 44.268,25.206 45.011,24.464 53.964,24.464 55.973,26.473 R17.1
LED_YELLOW_CH2: IC4.2 R20.1 | length 22.1
  Top Layer w0.152: IC4.2 32.95,23.058 33.879,23.987 34.991,23.987 36.502,25.498 40.101,25.498 40.173,25.425 40.93,25.425 41.291,25.787 42.109,25.787 42.282,25.613 44.437,25.613 44.53,25.52 49.189,25.52 50.893,27.224 R20.1
LED_YELLOW_CH3: IC4.3 R23.1 | length 17.6
  Top Layer w0.152: IC4.3 32.3,23.425 33.268,24.393 34.823,24.393 36.232,25.802 40.227,25.802 40.299,25.73 40.66,25.73 41.123,26.193 42.277,26.193 42.45,26.02 44.482,26.02 45.686,27.224 R23.1
LED_YELLOW_CH4: IC4.4 R26.1 | length 13.5
  Top Layer w0.152: IC4.4 31.65,23.35 33.099,24.799 34.655,24.799 35.977,26.121 40.011,26.121 41.114,27.224 R26.1
LED_YELLOW_CH5: IC4.5 R29.1 | length 9.3
  Top Layer w0.152: IC4.5 31,23.7 32.506,25.206 34.426,25.206 35.653,26.432 R29.1
LED_YELLOW_CH6: IC4.6 R32.1 | length 6.5
  Top Layer w0.152: IC4.6 30.35,24.85 30.954,25.454 R32.1
LED_YELLOW_CH7: IC4.7 R35.1 | length 7.9
  Top Layer w0.152: R35.1 25.874,27.026 29.7,23.2 IC4.7
NetC21_2: C21.2 U1.30 X1.1 | length 10.1
  Top Layer w0.152: C21.2 68.45,6.45 X1.1 ; X1.1@69.1,7.4 69.964,8.264 70.912,8.264 71.049,8.128 72.827,8.128 74.02,9.321 U1.30
NetC22_2: C22.2 U1.31 X1.2 | length 7.2
  Top Layer w0.152: X1.2 73.25,6.35 C22.2 ; X1.2@73,7 74.52,8.52 U1.31
NetC23_1: C23.1 U1.20 | length 2.9
  Top Layer w0.305: C23.1 68.132,14.318 69.936,14.318 U1.20
NetC24_2: C24.2 U1.22 | length 3.3
  Top Layer w0.305: C24.2 67.8,12.8 68.327,13.327 U1.22
NetC25_1: C25.1 J1.2 R9.2 | length 5.6
  Top Layer w0.254: v1(79.883,26.924) 79.95,26.857 79.95,26.3 80.03,26.22 R9.2
  Bottom Layer w0.254: J1.2@76.69,28.732 78.498,26.924 v1(79.883,26.924)
NetC28_2: C28.2 J1.5 R11.1 R12.1 | length 13.5
  Top Layer w0.254: J1.5@72.88,31.272 72.072,31.272 70.5,29.7 70.5,27.9 72.5,25.9 C28.2 72.6,25.07 R11.1 73,24.747 75.2,24.747 75.207,24.754 77.116,24.754 R12.1
NetC62_2: C62.2 FB5.1 J4.29 | length 42.3
  Top Layer w0.152: FB5.1 22.4,34 21.9,34 21.9,33.05 22.532,33.05 22.816,32.766 22.816,25.493 22.521,25.198 22.521,17.548 28.174,11.895 28.364,11.895 30.556,9.703 30.556,8.484 29.972,7.899 28.6,7.899 28.067,7.366 28.067,6.223 27.229,5.385 25.984,5.385 25.527,5.842 25.527,7.963 J4.29
NetC63_2: C63.2 D4.4 FB4.1 J4.26 | length 43
  Top Layer w0.457: FB4.1 16.85,33.25 C63.2 ; 17.5,28.008 17.5,8.027 20.93,4.597 27.168,4.597 J4.26 ; 17.508,28.008 D4.4 19.45,30.29 18.955,30.785 18.955,33.223 18.273,33.223 18.2,33.15 C63.2@18.124,33.226
NetD4_2: D4.2 J4.28 L1.3 | length 29.4
  Top Layer w0.152: L1.3 21.129,31.55 21.98,30.699 21.98,28.58 21.35,27.95 D4.2 21.35,25.05 21.35,17.55 28.1,10.8 28.1,8.07 J4.28
NetD4_3: D4.3 J4.27 L1.2 | length 26.3
  Top Layer w0.152: L1.2 19.7,31.233 20.163,30.77 20.163,30.437 20.65,29.95 D4.3 21.35,29.75 20.7,29.1 20.7,24.9 ; 20.7,25 20.7,17.4 26.76,11.34 J4.27
NetFB4_2: FB4.2 J2.1 | length 18.2
  Top Layer w0.5: FB4.2 16.6,35.5 v2(17.5,35.5)
  Bottom Layer w0.5: v2(17.5,35.5) 19,34 25.242,34 25.258,34.015 26.15,34.015 26.166,34 26.5,34 27,34.5 27,39 27.8,39.8 J2.1
NetFB5_2: FB5.2 J2.4 | length 6.3
  Top Layer w0.5: FB5.2 23.9,36.4 v2(24,36.5)
  Bottom Layer w0.5: v2(24,36.5) 24,38 25.85,39.85 J2.4
NetIC3_9: IC3.9 IC4.14 | length 8.7
  Top Layer w0.152: IC4.14 v1(32.3,17.7) ; v1(35.7,14.6) 36.6,14.6 36.725,14.725 IC3.9
  Bottom Layer w0.152: v1(32.3,17.7) 32.6,17.7 v1(35.7,14.6)
NetIC4_9: IC4.9 IC5.14 | length 23.6
  Top Layer w0.152: IC4.9 29.05,17.35 31.4,19.7 v1(42.1,19.7) ; v1(42.1,18.1) 42.223,18.223 46.377,18.223 46.975,17.625 IC5.14
  Bottom Layer w0.152: v1(42.1,18.1) v1(42.1,19.7)
NetJ2_2: J2.2 L1.1 | length 12.9
  Top Layer w0.152: L1.1 19.7,33.942 20.149,34.392 20.149,36.149 21.508,37.508 23.485,37.508 24.5,38.523 24.5,39 25.5,40 v2(27,40)
  Bottom Layer w0.152: v2(27,40) 27.15,40.15 J2.2
NetJ2_3: J2.3 L1.4 | length 11.7
  Top Layer w0.152: L1.4 20.5,36 21.704,37.204 23.612,37.204 25.908,39.5 v2(26.5,39.5)
  Bottom Layer w0.152: v2(26.5,39.5) J2.3
NetJ4_19: J4.19 PB2.1 | length 52.4
  Top Layer w0.152: PB2.1 14,35.25 14,27.5 v2(16.5,25) ; v2@23,24.892 23.5,24.392 23.5,17 28.3,12.2 35.8,12.2 36.92,11.08 J4.19
  Bottom Layer w0.152: v2(16.5,25) v2(23,25)
NetJ4_20: J4.20 PB3.1 | length 54.9
  Top Layer w0.152: v2(16.5,26) 14.5,28 14.5,36 16,37.5 16.5,37.5 16.75,37.75 PB3.1 ; v2(23.5,26) 23.521,25.979 23.521,24.802 23.805,24.518 23.805,17.195 28.427,12.573 36.002,12.573 38.2,10.375 38.2,8.01 J4.20
  Bottom Layer w0.152: v2(16.5,26) v2(23.5,26)
NetLD1_2: LD1.2 R13.2 | length 8.9
  Top Layer w0.152: LD1.2 61.4,36.993 61.4,35.4 61.9,34.9 61.9,31.4 62.323,30.977 R13.2
NetLD1_4: LD1.4 R14.2 | length 6.3
  Top Layer w0.152: LD1.4 61.38,34.473 61.38,32.08 60.799,31.499 R14.2
NetLD1_6: LD1.6 R15.2 | length 3.5
  Top Layer w0.152: R15.2 59.275,30.975 60.375,32.075 LD1.6
NetLD2_2: LD2.2 R16.2 | length 9
  Top Layer w0.152: LD2.2 56.8,36.64 56.8,35.1 56.957,34.943 56.957,31.943 57.497,31.403 R16.2
NetLD2_4: LD2.4 R17.2 | length 6.2
  Top Layer w0.152: LD2.4 56.427,34.473 56.427,31.627 55.973,31.173 R17.2
NetLD2_6: LD2.6 R18.2 | length 3.5
  Top Layer w0.152: R18.2 54.449,30.749 55.422,31.722 LD2.6
NetLD3_2: LD3.2 R19.2 | length 8.9
  Top Layer w0.152: LD3.2 51.8,36.687 51.8,34.8 51.881,34.719 51.881,31.357 52.417,30.821 R19.2
NetLD3_4: LD3.4 R20.2 | length 6.3
  Top Layer w0.152: LD3.4 50.469,34.831 51.25,34.05 51.25,33.803 51.474,33.579 51.474,32.522 50.893,31.94 R20.2
NetLD3_6: LD3.6 R21.2 | length 3.5
  Top Layer w0.152: R21.2 49.369,30.769 50.469,31.869 LD3.6
NetLD4_2: LD4.2 R22.2 | length 8.8
  Top Layer w0.152: LD4.2 46.6,36.934 46.6,34.8 47,34.4 47,30.092 R22.2
NetLD4_4: LD4.4 R23.2 | length 6.4
  Top Layer w0.152: LD4.4 45.516,34.36 46.521,33.354 46.521,32.522 45.686,31.686 R23.2
NetLD4_6: LD4.6 R24.2 | length 3.6
  Top Layer w0.152: R24.2 44.162,30.962 45.516,32.316 LD4.6
NetLD5_2: LD5.2 R25.2 | length 9
  Top Layer w0.152: LD5.2 41.9,36.681 41.9,34.7 41.975,34.625 41.975,31.725 42.638,31.062 R25.2
NetLD5_4: LD5.4 R26.2 | length 6.2
  Top Layer w0.152: LD5.4 40.563,34.937 41.568,33.932 41.568,31.768 41.114,31.314 R26.2
NetLD5_6: LD5.6 R27.2 | length 3.5
  Top Layer w0.152: R27.2 39.59,30.89 40.563,31.863 LD5.6
NetLD6_2: LD6.2 R28.2 | length 8.8
  Top Layer w0.152: LD6.2 35.61,37.19 37.022,35.778 37.022,30.037 R28.2
NetLD6_4: LD6.4 R29.2 | length 6.4
  Top Layer w0.152: LD6.4 36.615,34.473 36.615,32.315 35.653,31.353 R29.2
NetLD6_6: LD6.6 R30.2 | length 3.7
  Top Layer w0.152: R30.2 34.129,30.929 35.61,32.41 LD6.6
NetLD7_2: LD7.2 R31.2 | length 8.9
  Top Layer w0.152: LD7.2 31.7,36.975 31.7,34.5 32.192,34.008 32.192,32.513 32.2,32.505 32.2,31.3 32.478,31.022 R31.2
NetLD7_4: LD7.4 R32.2 | length 6.3
  Top Layer w0.152: LD7.4 30.657,34.36 31.662,33.354 31.662,31.962 30.954,31.254 R32.2
NetLD7_6: LD7.6 R33.2 | length 3.6
  Top Layer w0.152: R33.2 29.43,30.73 30.657,31.957 LD7.6
NetLD8_2: LD8.2 R34.2 | length 8.9
  Top Layer w0.152: LD8.2 26.709,37.013 26.709,35.391 27.239,34.861 27.239,29.882 R34.2
NetLD8_4: LD8.4 R35.2 | length 6.4
  Top Layer w0.152: LD8.4 26.709,34.473 26.709,32.412 26.6,32.303 26.6,31.9 25.874,31.174 R35.2
NetLD8_6: LD8.6 R36.2 | length 3.6
  Top Layer w0.152: R36.2 24.35,31.584 LD8.6
NetR10_1: R10.1 U1.10 | length 2.8
  Top Layer w0.152: R10.1 71.476,20.904 71.924,20.456 72.177,20.456 72.52,20.112 U1.10
P3V3: C1.1 C2.1 C3.1 C59.1 FB3.1 IC3.10 IC3.16 IC4.10 IC4.16 IC5.10 IC5.16 J1.D1 J1.D3 J4.21 J4.22 U1.28 U1.43 U1.44 U1.45 | length 180.9
  Top Layer w0.305: v1(66.2,5.232) 66.2,8 67.2,9 70.715,9 71.206,8.509 72.669,8.509 72.85,8.69 72.85,9.2 73.02,9.37 U1.28 ; J1.D3@67.191,41 67.191,43.191 68,44 73.2,44 74.676,42.524 79.84,42.524 79.84,41.834 76.479,38.473 76.479,35.687 77.165,35.001 78.778,35.001 80.66,33.119 80.681,33.119 82.3,31.5 82.3,17.3 FB3.1@81.3,16.3 ; U1.43 80.227,15.327 FB3.1@80.727,15.827 ; U1.44 FB3.1@80.727,15.827 ; U1.45 80.773,16.327 FB3.1 FB3.1@80.727,15.827
  Top Layer w0.457: IC4.10 29.7,14.4 31.043,13.057 v1(34.204,13.057) v1(34.925,13.778) 37.375,13.778 IC3.10 ; v1(33.6,14.9) IC4.16 ; IC3.16 41.275,14.825 v1(41.3,14.8) ; v1(41.427,12.954) 43.739,12.954 44.375,13.59 v1(44.375,14.225) IC5.10 ; v1@48.275,14.325 IC5.16 ; v1(79.07,8.103) 80.256,9.288 80.256,9.356 81,10.1 FB3.1
  Top Layer w0.762: v1(34.265,11.455) 34.265,10.389 34.38,10.273 J4.21 J4.22 34.38,5.092 36.551,2.921 v1(59.868,2.921)
  Bottom Layer w0.457: v1@34.8,13.7 37.5,13.7 39.1,12.1 41.4,12.1 41.4,14.7 v1(41.3,14.8) ; v1(44.375,14.225) v1(48.337,14.225) ; v1@66.218,5.232 66.218,4.418 66.2,4.4 66.2,2.8 68.136,0.864 73.279,0.864 74.5,2.085 74.5,8 78.9,8 v1(79.6,8.7)
  Bottom Layer w0.762: v1(33.6,14.9) 34.265,14.235 v1(34.265,11.455) v3(35.306,11.455) ; v1(58.776,2.972) 58.826,2.921 v1(59.868,2.921) 60.647,3.7 65.5,3.7 v1@66.2,4.4
  other v1: 66.218,4.521
P3V3A: C26.1 C27.1 C29.1 C30.1 C31.1 FB3.2 R7.2 R8.2 R9.1 U1.4 U1.8 U1.15 U1.17 U1.21 | length 53.8
  Top Layer w0.305: v1(66.661,18.339) C26.1 67.011,16.759 C29.1@68.047,16.759 ; v1(67.2,13.1) 67.45,13.35 67.45,13.8 67.477,13.827 U1.21 ; U1.17 68.473,15.827 68.047,16.253 C29.1@68.047,16.759 ; U1.15 68.115,16.827 C29.1@68.047,16.759 ; v1(73.5,21.8) 73.477,21.777 73.477,21.173 73.52,21.13 U1.8 73.52,18.305 73.575,18.25 73.575,18.125 73.9,17.8 74.6,17.8 ; C30.1@75.8,21.05 75.52,20.77 U1.4 75.52,18.32 75,17.8 74.6,17.8 ; v1(76.3,22.6) R8.2 ; R9.1 80.97,23.67 80.07,22.77 R7.2 81,21.67 FB3.2 80.2,18.7 78.15,18.7 76,16.55 v1(74.7,16.55) 74.7,17.7 74.6,17.8
  Bottom Layer w0.305: v1(66.661,18.339) 68.3,16.7 ; v1(67.2,13.1) 67.2,15.6 68.3,16.7 ; v1(73.5,21.8) 74.3,22.6 v1(76.3,22.6) ; v1(74.7,16.55) 72.381,16.55 71.603,15.772 71.143,15.772 71.115,15.8 69.2,15.8 68.3,16.7
RESETN: J4.10 U1.37 | length 42.4
  Top Layer w0.152: J4.10 49.62,5.78 51.2,4.2 55.569,4.2 56.238,3.531 60.12,3.531 63.056,0.595 73.295,0.595 75.771,3.071 75.771,5.337 78,7.566 78,9.1 79.9,11 79.9,12 79.573,12.327 U1.37
RJ45_GRN: J1.D2 U1.27 | length 35.1
  Top Layer w0.152: v1(70.5,19.6) 70.099,20.001 70.099,29.76 69.312,30.548 69.312,32.988 71.024,34.7 71.024,34.724 J1.D2@77.3,41 ; v1(72.5,17.2) 72.52,17.18 U1.27
  Bottom Layer w0.152: v1(70.5,19.6) 70.5,18.863 71.822,17.541 72.159,17.541 v1(72.5,17.2)
RJ45_RX_C_N: C20.2 J1.6 | length 8.3
  Top Layer w0.254: J1.6@71.61,28.732 72.632,28.732 73.071,29.171 73.071,29.179 73.703,29.811 74.597,29.811 75.23,29.179 75.23,26.116 75.746,25.6 C20.2
RJ45_RX_C_P: C19.2 J1.4 | length 3.5
  Top Layer w0.254: J1.4@74.15,28.732 74.15,27.55 74.7,27 74.7,26.135 74.27,25.705 C19.2
RJ45_RX_N: C20.1 R12.2 U1.5 | length 6.4
  Top Layer w0.254: U1.5 75.02,20.354 75.024,20.358 75.024,22.485 75.339,22.8 75.339,23.439 C20.1 76.17,23.73 R12.2
RJ45_RX_P: C19.1 R11.2 U1.6 | length 6.3
  Top Layer w0.254: R11.2 74.007,23.73 C19.1 74.831,23.432 74.831,23.01 74.516,22.695 74.516,20.358 74.52,20.354 U1.6
RJ45_TX_N: J1.3 R7.1 U1.1 | length 22.2
  Top Layer w0.254: J1.3@75.42,31.272 76.492,32.343 76.492,33.21 77.29,34.008 78.71,34.008 80.108,32.61 80.108,28.808 78.804,27.504 78.804,22.926 R7.1 78.808,22.278 78.808,21.69 78.118,21 77.2,21 77.02,20.82 U1.1
RJ45_TX_P: J1.1 R8.1 U1.2 | length 20.5
  Top Layer w0.254: U1.2 76.52,21.038 76.99,21.508 77.908,21.508 78.3,21.9 78.3,22.27 R8.1 78.296,22.926 78.296,27.714 79.6,29.018 79.6,32.4 78.5,33.5 77.5,33.5 77,33 77,32.232 J1.1@77.96,31.272
RJ45_YEL: J1.D4 U1.25 | length 35.1
  Top Layer w0.152: J1.D4@69.731,42.524 69.731,39.718 70.307,39.141 70.307,36.619 69.731,36.043 69.731,34.531 67.7,32.5 67.7,21.6 72,17.3 72,15.4 71.52,14.92 U1.25
SPI1_MISO: J4.8 U1.34 | length 34.3
  Top Layer w0.152: J4.8 53.367,7.937 54.948,7.937 56.1,6.785 56.1,6.3 57.955,4.445 60.499,4.445 63.044,1.9 73.055,1.9 74.857,3.702 74.857,6.657 76.02,7.82 U1.34
SPI1_MOSI: J4.6 U1.35 | length 31.2
  Top Layer w0.152: J4.6 57.29,4.14 60.373,4.14 63.013,1.5 73.1,1.5 75.162,3.562 75.162,6.462 76.52,7.82 U1.35
SPI1_NSS: J4.2 U1.32 | length 23.7
  Top Layer w0.152: J4.2 63.71,2.8 73.093,2.8 74.247,3.954 74.247,7.247 75.02,8.02 U1.32
SPI1_SCK: J4.4 U1.33 | length 27.1
  Top Layer w0.152: J4.4 58.67,5.3 60.4,5.3 63.4,2.3 73.024,2.3 74.552,3.828 74.552,6.852 75.52,7.82 U1.33
pads on no net: IC5.9 J1.7 J1.M1 J1.M2 J2.PastePad J4.23 J4.24 U1.7 U1.12 U1.13 U1.18 U1.23 U1.24 U1.26 U1.38 U1.39 U1.40 U1.41 U1.42 U1.46 U1.47

## Polygon pours and split planes (outlines as drawn)
GND on Bottom Layer "Top-No Net" (solid, remove dead copper, pour order 0): 1,44 82,44 82,1 1,1

## Keep-outs
Keep-Out Layer:
  lines w0.1: 5,8 12,8 13,7 13,0 ; 69.531,37.592 cw(c67.8,37.622) 69.531,37.644 ; 75,0 75,6 77,8 83,8 ; 80.961,37.592 cw(c79.23,37.622) 80.961,37.644

## Other copper
Top Layer:
  rectangle net P3V3: 66.015,4.293 66.446,5.512
  rectangle net P3V3: 78.816,7.772 79.883,8.941
  rectangle net P3V3: 58.445,2.667 60.071,3.226
  rectangle net P3V3: 34.011,11.176 35.535,11.709
Bottom Layer:
  rectangle net P3V3: 78.791,7.747 79.948,9.048

## Silkscreen, mask and mechanical layers (free items; w line width, h text height)
Mechanical 1:
  lines w0.01: 5,0 55,0 83,0 83,45 5,45 5,0

## Text inside footprints (layer, text, board x,y; h text height)
J2: Drill Drawing "0.85" at 24.998,47.916 h1 r180; Drill Drawing "1.87" at 26.141,45.311 h1 r90; Drill Drawing "r0.2" at 28.8,42.3 h1 r180; Mechanical 8 "PCB end" at 22.2,46.075 h0.5 r180
J4: Top Overlay "30" at 24.855,5.333 h1.02 r180; Mechanical 14 "30" at 24.855,5.333 h1.02 r180
LD1: Top Overlay "A" at 59.867,31.873 h1 r270; Top Overlay "C" at 62.407,31.873 h1 r270; Mechanical 14 "A" at 59.845,31.878 h1 r270; Mechanical 14 "C" at 62.445,31.878 h1 r270
LD2: Top Overlay "A" at 54.914,31.873 h1 r270; Top Overlay "C" at 57.454,31.873 h1 r270; Mechanical 14 "A" at 54.892,31.878 h1 r270; Mechanical 14 "C" at 57.492,31.878 h1 r270
LD3: Top Overlay "A" at 49.961,31.873 h1 r270; Top Overlay "C" at 52.501,31.873 h1 r270; Mechanical 14 "A" at 49.939,31.878 h1 r270; Mechanical 14 "C" at 52.539,31.878 h1 r270
LD4: Top Overlay "A" at 45.008,31.873 h1 r270; Top Overlay "C" at 47.548,31.873 h1 r270; Mechanical 14 "A" at 44.986,31.878 h1 r270; Mechanical 14 "C" at 47.586,31.878 h1 r270
LD5: Top Overlay "A" at 40.055,31.873 h1 r270; Top Overlay "C" at 42.595,31.873 h1 r270; Mechanical 14 "A" at 40.033,31.878 h1 r270; Mechanical 14 "C" at 42.633,31.878 h1 r270
LD6: Top Overlay "A" at 35.102,31.873 h1 r270; Top Overlay "C" at 37.642,31.873 h1 r270; Mechanical 14 "A" at 35.08,31.878 h1 r270; Mechanical 14 "C" at 37.68,31.878 h1 r270
LD7: Top Overlay "A" at 30.149,31.873 h1 r270; Top Overlay "C" at 32.689,31.873 h1 r270; Mechanical 14 "A" at 30.127,31.878 h1 r270; Mechanical 14 "C" at 32.727,31.878 h1 r270
LD8: Top Overlay "A" at 25.196,31.873 h1 r270; Top Overlay "C" at 27.736,31.873 h1 r270; Mechanical 14 "A" at 25.174,31.878 h1 r270; Mechanical 14 "C" at 27.774,31.878 h1 r270